# Altium PCB PCB1.PcbDoc (part 3 of 4)
Units mil, origin at the board's own origin, x right, y up, seen from the top; angles counter-clockwise.
Board outline 1968.5 x 2362.2 mil, 4 copper layers (Top Layer, GND, VCC, Bottom Layer), stack 30.634 mil thick; 134 components, 248 nets, 1063 pads, 710 vias.
Unrouted connection lines stored in the file: 163.
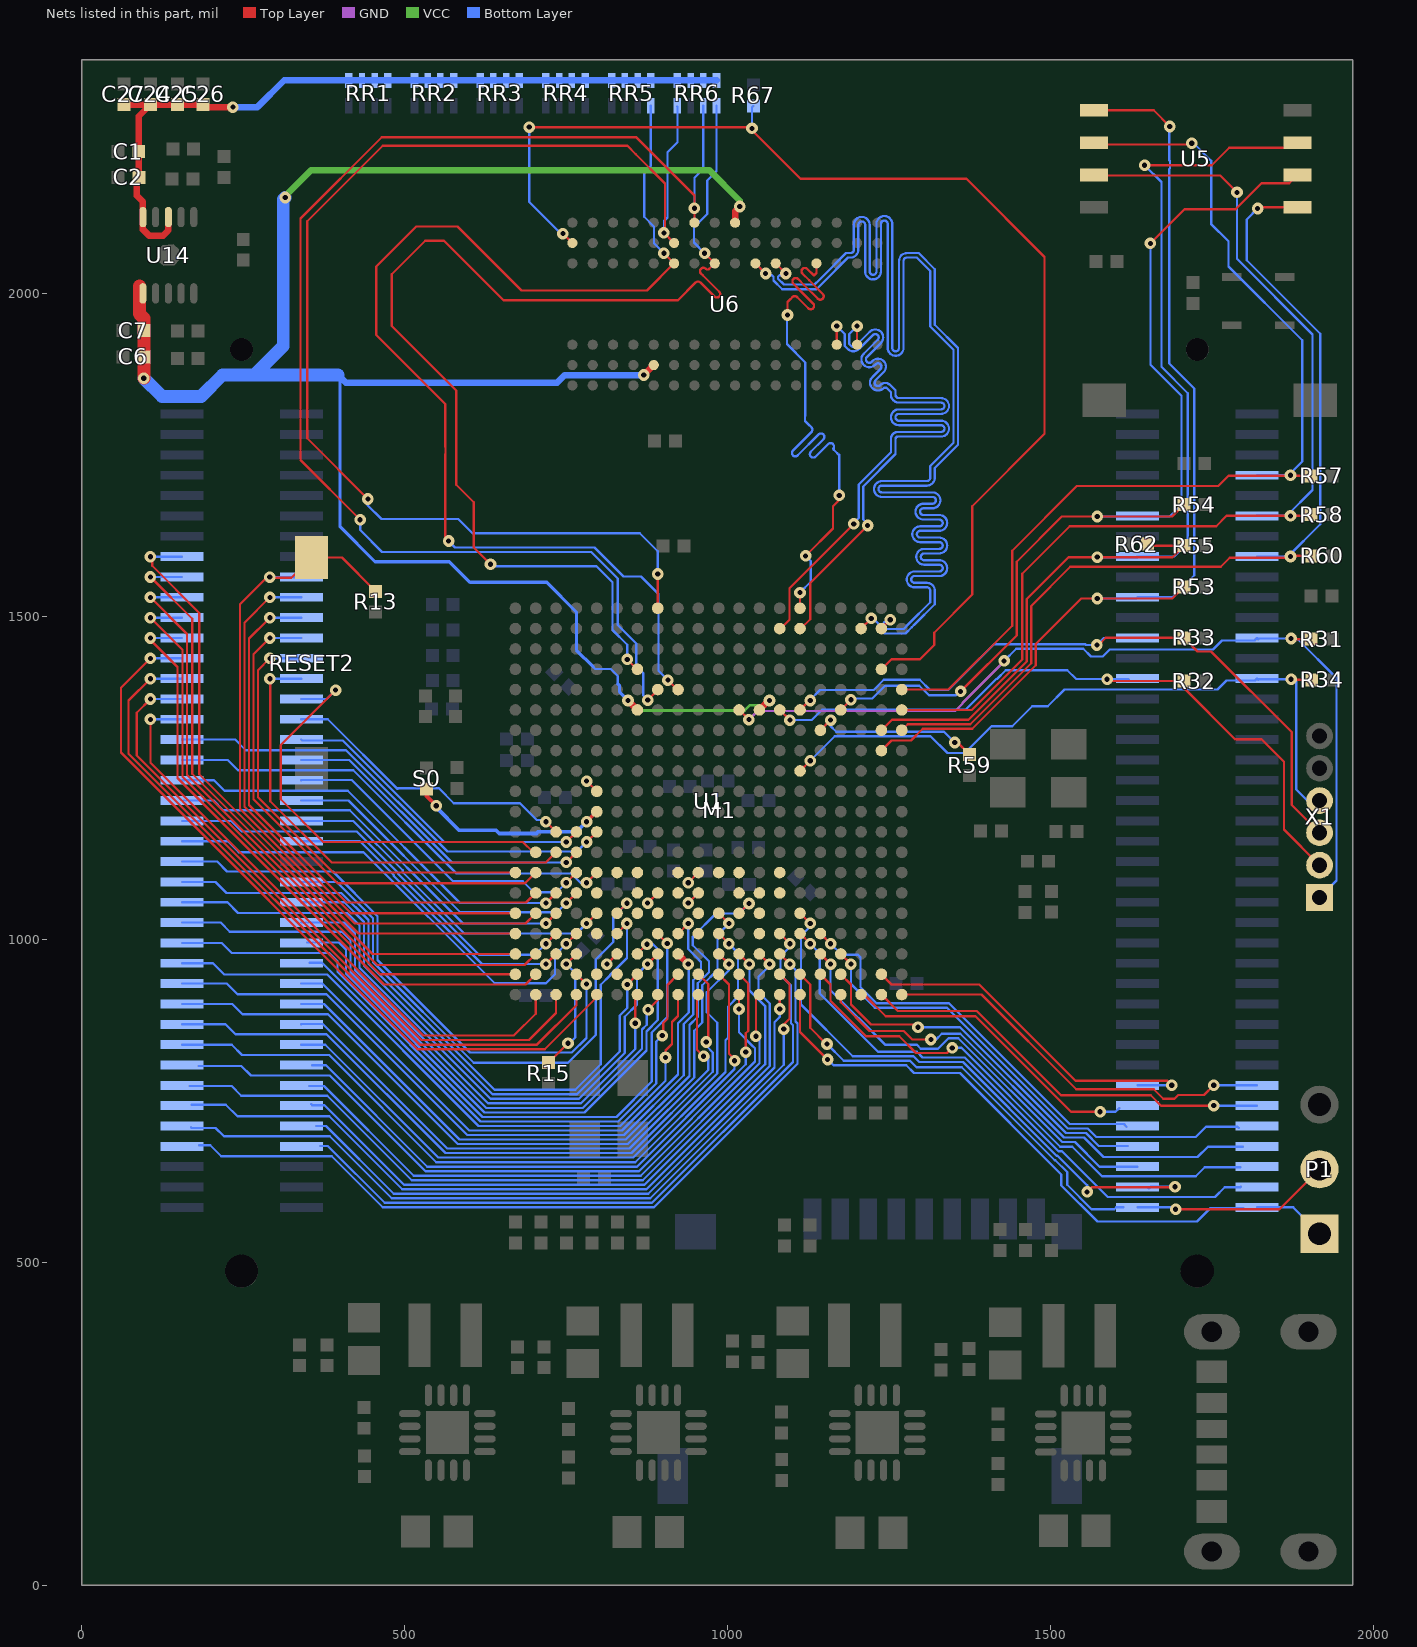
[diagram p5: the nets of this part, all layers, seen from the top]

## Via types
v1: diameter 18, hole 8, Top Layer to Bottom Layer, tented both sides, 708 vias
v2: diameter 40, hole 20, Top Layer to Bottom Layer, tented both sides, 2 vias

## Nets (pads, with @x,y where several pads share a name; then routed paths per layer and width w, separated by ;. In a path a pad name is that pad's centre, name@x,y a point inside that pad or via, vN(x,y) a via of type N, cw(c..) or ccw(c..) an arc to the next point about the centre after c; other vN are vias at no path point) (continued)
ADDR3-DM1: U1.F1 U6.D3 | length 986
  Top Layer w3.5: v1(1093,1967) 1093,1987.27 1096.71,1990.98 1100.42,1994.69 cw(c1104.14,1990.98) 1107.85,1994.69 1125.11,1977.43 ccw(c1128.83,1981.14) 1132.54,1977.43 ccw(c1128.83,1981.14) 1132.54,1984.85 1111.56,2005.83 1102.02,2015.37 cw(c1105.73,2019.08) 1102.02,2022.79 cw(c1105.73,2019.08) 1109.45,2022.79 1118.99,2013.25 1139.96,1992.28 ccw(c1143.67,1995.99) 1147.38,1992.28 ccw(c1143.67,1995.99) 1147.38,1999.71 1126.41,2020.68 1116.14,2030.95 cw(c1119.85,2034.66) 1116.14,2038.37 cw(c1119.85,2034.66) 1123.57,2038.37 1133.84,2028.1 ; U1.F1@1112.35,1512.85 v1(1112.35,1537) ; v1(1121,1594) 1163.5,1636.5 1163.5,1671 1173,1680.5 v1(1173,1687.59) ; 1133.87,2028.13 1137.73,2032 1137.73,2036.49 1137.73,2043.49 U6.D3@1137.73,2046.99
  Bottom Layer w3.5: v1(1093,1967) 1091.99,1965.99 1091.99,1922.01 1120.49,1893.51 1120.49,1810.51 ; v1(1112.35,1537) 1112.35,1537.35 1129,1554 1129,1586 v1(1121,1594) ; 1120,1810 1120,1803 1122.5,1800.5 1126.21,1796.79 1129.92,1793.08 cw(c1126.21,1789.36) 1129.92,1785.65 1101.37,1757.1 ccw(c1105.09,1753.39) 1101.37,1749.67 ccw(c1105.09,1753.39) 1108.8,1749.67 1141.06,1781.94 cw(c1144.77,1778.23) 1148.49,1781.94 cw(c1144.77,1778.23) 1148.49,1774.51 1129.1,1755.12 ccw(c1132.81,1751.41) 1129.1,1747.7 ccw(c1132.81,1751.41) 1136.52,1747.7 1155.91,1767.09 cw(c1159.62,1763.38) 1163.34,1767.09 cw(c1159.62,1763.38) 1163.34,1759.66 1164.73,1761.06 ccw(c1166.13,1759.66) 1164.73,1758.27 1170,1753 1172,1751 1173,1751 v1(1173,1687.59)
ADDR3-DQS0_N: U1.B2 U6.G3 | length 2001.2
  Top Layer w3.5: U6.G3@1043.24,2046.99 v1(1058.99,2031.24) ; U1.B2@1238.35,1481.35 v1(1252,1495)
  Bottom Layer w3.5: v1(1058.99,2031.24) 1061.77,2028.47 1069.01,2028.47 1071.24,2026.24 1071.24,2020.44 1084.61,2007.07 1137.66,2007.07 1147.34,2016.75 1186.59,2056 1190.39,2056 ccw(c1190.39,2068.25) 1202.64,2068.25 1202.64,2106.75 cw(c1207.89,2106.75) 1213.14,2106.75 1213.14,2034.4 ccw(c1225.39,2034.4) 1237.64,2034.4 1237.64,2108 cw(c1242.89,2108) 1248.14,2108 1248.14,1916 ccw(c1260.39,1916) 1272.64,1916 1272.64,2050.75 cw(c1277.89,2050.75) 1277.89,2056 1293.1,2056 1314,2035.1 1314,1949.1 1350,1913.1 1350,1769 1314,1733 1314,1715 cw(c1308.75,1715) 1308.75,1709.75 1239.09,1709.75 ccw(c1239.09,1697.5) 1239.09,1685.25 1317.5,1685.25 cw(c1317.5,1680) 1322.75,1680 cw(c1317.5,1680) 1317.5,1674.75 1303.46,1674.75 ccw(c1303.46,1662.5) 1303.46,1650.25 1327.98,1650.25 cw(c1327.98,1645) 1333.23,1645 cw(c1327.98,1645) 1327.98,1639.75 1298.52,1639.75 ccw(c1298.52,1627.5) 1298.52,1615.25 1327.98,1615.25 cw(c1327.98,1610) 1333.23,1610 cw(c1327.98,1610) 1327.98,1604.75 1304.64,1604.75 ccw(c1304.64,1592.5) 1304.64,1580.25 1327.98,1580.25 cw(c1327.98,1575) 1333.23,1575 cw(c1327.98,1575) 1327.98,1569.75 1289.85,1569.75 ccw(c1289.85,1557.5) 1289.85,1545.25 1308.75,1545.25 cw(c1308.75,1540) 1314,1540 1314,1522 1280.46,1488.46 1272.82,1480.82 1258.99,1480.82 1258.91,1480.75 1246.1,1480.75 1240.8,1486.05 1240.8,1488.95 1242.85,1491 1244.07,1491 1248.08,1495 v1(1252,1495)
ADDR3-DQS0_P: U1.C2 U6.F3 | length 2030.8
  Top Layer w3.5: U6.F3@1074.74,2046.99 v1(1090.49,2031.24) ; U1.C2@1209.35,1481.35 U1.C2@1206.85,1481.35 v1(1222.6,1497.1)
  Bottom Layer w3.5: v1(1090.49,2031.24) 1087.72,2028.47 1080.47,2028.47 1078.24,2026.24 1078.24,2023.34 1087.51,2014.07 1134.76,2014.07 1142.39,2021.7 1147.77,2027.08 1183.69,2063 1190.39,2063 ccw(c1190.39,2068.25) 1195.64,2068.25 1195.64,2106.75 cw(c1207.89,2106.75) 1220.14,2106.75 1220.14,2034.4 ccw(c1225.39,2034.4) 1230.64,2034.4 1230.64,2108 cw(c1242.89,2108) 1255.14,2108 1255.14,1916 ccw(c1260.39,1916) 1265.64,1916 1265.64,2050.75 cw(c1277.89,2050.75) 1277.89,2063 1296,2063 1321,2038 1321,1952 1357,1916 1357,1766.1 1321,1730.1 1321,1715 cw(c1308.75,1715) 1308.75,1702.75 1239.09,1702.75 ccw(c1239.09,1697.5) 1239.09,1692.25 1317.5,1692.25 cw(c1317.5,1680) 1329.75,1680 cw(c1317.5,1680) 1317.5,1667.75 1303.46,1667.75 ccw(c1303.46,1662.5) 1303.46,1657.25 1327.98,1657.25 cw(c1327.98,1645) 1340.23,1645 cw(c1327.98,1645) 1327.98,1632.75 1298.52,1632.75 ccw(c1298.52,1627.5) 1298.52,1622.25 1327.98,1622.25 cw(c1327.98,1610) 1340.23,1610 cw(c1327.98,1610) 1327.98,1597.75 1304.64,1597.75 ccw(c1304.64,1592.5) 1304.64,1587.25 1327.98,1587.25 cw(c1327.98,1575) 1340.23,1575 cw(c1327.98,1575) 1327.98,1562.75 1289.85,1562.75 ccw(c1289.85,1557.5) 1289.85,1552.25 1308.75,1552.25 cw(c1308.75,1540) 1321,1540 1321,1519.1 1290.36,1488.46 1285.41,1483.51 1275.72,1473.82 1261.89,1473.82 1261.81,1473.75 1243.2,1473.75 1233.8,1483.15 1233.8,1488.95 1225.65,1497.1 v1(1222.6,1497.1)
ADDR3-DQS1_N: U1.F2 U6.B7 | length 1031.1
  Top Layer w3.5: U1.F2@1112.35,1481.35 U1.F2@1113.35,1481.35 ; U1.F2@1113,1481 U1.F2@1113.35,1481.35 ; U6.B7@1200.72,1921.01 v1(1200.72,1949.77) ; v1(1217,1641) 1128,1552 1128,1496 U1.F2@1113.35,1481.35
  Bottom Layer w3.5: 1198.57,1919.3 cw(c1194.88,1923.03) 1191.16,1919.31 1188.48,1922 1188.48,1937.52 v1(1200.72,1949.77) ; 1198.59,1919.31 1220.23,1940.95 cw(c1228.89,1932.29) 1237.55,1940.95 cw(c1228.89,1932.29) 1241.14,1932.29 cw(c1228.89,1932.29) 1237.55,1923.63 1215.91,1901.99 ccw(c1219.62,1898.28) 1215.91,1894.56 ccw(c1219.62,1898.28) 1223.32,1894.55 ; v1(1217,1641) 1217,1643.48 1210.18,1650.3 1210.18,1701.59 1260.19,1751.6 1260.19,1775 cw(c1264.03,1775) 1264.03,1778.84 1330.75,1778.84 ccw(c1330.75,1791.09) 1343,1791.09 ccw(c1330.75,1791.09) 1330.75,1803.34 1265.44,1803.34 cw(c1265.44,1808.59) 1265.44,1813.84 1330.75,1813.84 ccw(c1330.75,1826.09) 1343,1826.09 ccw(c1330.75,1826.09) 1330.75,1838.34 1265.44,1838.34 cw(c1265.44,1843.59) 1260.19,1843.59 1260.19,1850.29 1251.97,1858.51 ccw(c1244.37,1850.92) 1236.78,1858.51 cw(c1233.07,1862.23) 1229.36,1858.51 cw(c1233.07,1862.23) 1229.36,1865.94 1241.77,1878.35 ccw(c1233.11,1887.01) 1245.36,1887.01 ccw(c1233.11,1887.01) 1224.45,1895.67 1223.34,1894.56
ADDR3-DQS1_P: U1.G2 U6.C7 | length 1035.4
  Top Layer w3.5: U1.G2@1080.85,1481.35 1082.35,1481.35 1096,1495 1096,1544 v1(1195.5,1643.5) ; U6.C7@1169.23,1921.01 v1(1169.23,1949.77)
  Bottom Layer w3.5: v1(1169.23,1949.77) 1181.48,1937.52 1181.48,1919.1 1186.21,1914.36 ccw(c1194.88,1923.03) 1203.54,1914.36 1225.18,1936.01 cw(c1228.89,1932.29) 1232.6,1936.01 cw(c1228.89,1932.29) 1234.14,1932.29 cw(c1228.89,1932.29) 1232.6,1928.58 1210.96,1906.94 ccw(c1219.62,1898.28) 1210.96,1889.61 ccw(c1219.62,1898.28) 1228.29,1889.61 1229.4,1890.72 cw(c1233.11,1887.01) 1236.81,1890.74 ; v1(1195.5,1643.5) 1195.5,1645.12 1203.18,1652.8 1203.18,1704.48 1253.19,1754.49 1253.19,1775 cw(c1264.03,1775) 1264.03,1785.84 1330.75,1785.84 ccw(c1330.75,1791.09) 1336,1791.09 ccw(c1330.75,1791.09) 1330.75,1796.34 1265.44,1796.34 cw(c1265.44,1808.59) 1265.44,1820.84 1330.75,1820.84 ccw(c1330.75,1826.09) 1336,1826.09 ccw(c1330.75,1826.09) 1330.75,1831.34 1265.44,1831.34 cw(c1265.44,1843.59) 1253.19,1843.59 1253.19,1847.39 1247.02,1853.56 ccw(c1244.37,1850.92) 1241.73,1853.56 cw(c1233.07,1862.23) 1224.41,1853.56 cw(c1233.07,1862.23) 1224.41,1870.89 1236.82,1883.3 ccw(c1233.11,1887.01) 1238.36,1887.01 ccw(c1233.11,1887.01) 1236.82,1890.72
ADDR3-ODT0: RR6.6 U1.N5 U6.K1 | length 2087.3
  Top Layer w3.5: v1(431,1650) 338.5,1742.5 338.5,2116.5 464.5,2242.5 858.5,2242.5 859,2242 948.76,2152.24 v1(948.76,2132.26) U6.K1@948.76,2109.98 ; v1(876.4,1370.6) U1.N5@892.15,1386.35
  Bottom Layer w3.5: v1(431,1650) 431,1634 465,1600 789,1600 830,1559 830,1487 858.85,1458.15 858.85,1423.15 869.4,1412.6 869.4,1377.6 v1(876.4,1370.6) ; v1(948.76,2132.26) 948.76,2179.76 962.53,2193.53 RR6.6@962.53,2291
ADDR3-RAS: RR6.5 U1.P4 U6.J3 | length 1813.3
  Top Layer w3.5: v1(633,1581) 607,1607 607,1677 580,1704 580,1850 480,1950 480,2030.21 531.79,2082 561,2082 653,1990 923.26,1990 950.55,2017.29 cw(c954.27,2013.58) 957.98,2017.29 979.68,1995.6 ccw(c983.39,1999.31) 987.1,1995.59 ccw(c983.39,1999.31) 987.1,2003.02 961.69,2028.43 958.9,2031.22 cw(c962.61,2034.93) 958.9,2038.64 cw(c962.61,2034.93) 966.33,2038.64 ccw(c969.11,2041.43) 971.9,2038.64 976.54,2043.28 U6.J3@980.25,2046.99 v1(964.5,2062.74) ; v1(844.6,1433.6) U1.P4@860.35,1417.85
  Bottom Layer w3.5: v1(633,1581) 630,1578 797,1578 822,1553 822,1479 844.6,1456.4 v1(844.6,1433.6) ; v1(964.5,2062.74) 948,2079.24 948,2103 968.5,2123.5 968.5,2175.5 983,2190 RR6.5@983,2291
ADDR3-RESET: R67.1 U1.B4 U6.T2 | length 1895.5
  Top Layer w3.5: v1(693,2258) 1033,2258 1113,2178 1370,2178 1491,2057 1491,1783 1379,1671 1379,1534 1320,1475 1320,1456 1298,1434 1254,1434 U1.B4@1238.35,1418.35 ; v1(745,2093) 745,2093.27 U6.T2@759.78,2078.49
  Bottom Layer w3.5: v1(693,2258) 693,2142 742,2093 v1(745,2093) ; v1(1038,2256) 1038,2288.86 R67.1@1040,2290.86
ADDR3-S0: RR6.8 U1.N1 U6.L2 | length 1976.4
  Top Layer w3.5: v1(443,1682) 349,1776 349,2112.15 465.85,2229 485.9,2229 845,2229 858.08,2215.92 903.25,2170.75 903.25,2095.98 v1(901.51,2094.24) U6.L2@917.26,2078.49 ; U1.N1@891.95,1512.85 v1(891.95,1565.95)
  Bottom Layer w3.5: v1(443,1682) 443,1672 464,1651 583,1651 605,1629 863.95,1629 891.95,1601 v1(891.95,1565.95) ; v1(901.51,2094.24) 901.51,2112.51 907,2118 907,2219 922.37,2234.37 922.37,2289.63 RR6.8@922,2290
ADDR3-WE: RR5.5 U1.M5 U6.L3 | length 1805.1
  Top Layer w3.5: v1(568,1617) 563,1622 563,1751.26 563.25,1751.51 563.25,1762.49 563,1762.74 563,1829 456,1936 456,2042.21 517.79,2104 582,2104 681,2005 875.27,2005 U6.L3@917.26,2046.99 v1(901.51,2062.74) ; v1(907.6,1401.6) U1.M5@923.35,1385.85
  Bottom Layer w3.5: v1(568,1617) 578,1607 794,1607 839,1562 866,1562 893,1535 893,1416.2 v1(907.6,1401.6) ; RR5.5@881.2,2291 881.2,2198.2 871,2188 871,2119 886.25,2103.75 886.25,2078 v1(901.51,2062.74)
AJTAG_TCK: M1.J2_28 R34.2 U1.F9 X1.4 | length 1080.1
  Top Layer w3.5: U1.F9@1112.35,1260.85 v1(1128.05,1276.55) ; v1@1881,1402 R34.2@1904.86,1402
  Bottom Layer w3.5: v1(1128.05,1276.55) 1166.25,1314.75 1314.5,1314.75 1340.62,1288.63 1367.37,1288.63 1408.74,1330 1441,1330 1472,1361 1496,1361 1522,1387 1759,1387 1773,1401 1817.08,1401 M1.J2_28@1820.02,1403.94 M1.J2_28@1821.97,1402 ; M1.J2_28@1821,1402.97 v1(1872.86,1402.97) ; v1@1881,1402 1881,1232 1898,1215 X1.4@1917,1215
AJTAG_TDI: M1.J2_27 R32.2 U1.G6 X1.2 | length 1102.1
  Top Layer w3.5: U1.G6@1080.85,1355.35 v1(1096.6,1339.6) ; v1(1588,1403) 1591,1400 R32.2@1706.86,1400 1706.86,1389.14 1786,1310 1827,1310 1862,1275 1862,1170 X1.2@1917,1115
  Bottom Layer w3.5: v1(1096.6,1339.6) 1130.6,1339.6 1146.5,1355.5 1368.5,1355.5 1416.25,1403.25 1417.25,1403.25 1431,1417 1526.25,1417 1540,1403.25 1587.75,1403.25 v1(1588,1403) 1621,1403 M1.J2_27@1622,1402
AJTAG_TDO: M1.J2_23 R33.2 U1.F6 X1.3 | length 1124.1
  Top Layer w3.5: U1.F6@1112.35,1355.35 1127,1370 v1(1128.1,1370) ; v1(1572,1456) 1575,1456 1586,1467 R33.2@1706.86,1467 1727.86,1446 1749,1446 1874,1321 1874,1208 X1.3@1917,1165
  Bottom Layer w3.5: v1(1128.1,1370) 1128.1,1371.09 1143.35,1386.35 1226.35,1386.35 1242,1402 1297.9,1402 1313.55,1386.35 1342,1386.35 1412.65,1457 1553.9,1457 1554.9,1456 v1(1572,1456) 1582.93,1466.93 M1.J2_23@1634.98,1466.93
AJTAG_TMS: M1.J2_24 R31.2 U1.J6 X1.1 | length 1401.9
  Top Layer w3.5: U1.J6@1017.35,1356.15 v1(1033.1,1340.4) ; v1@1427.25,1431.25 v1(1428.4,1431.25) ; v1@1866,1465 1870,1465 R31.2@1903.86,1465
  GND w3.5: v1(1033.1,1340.4) 1046.55,1353.85 1352.85,1353.85 1364,1365 1364,1366 1428.4,1430.4 v1(1428.4,1431.25)
  Bottom Layer w3.5: v1(1428.4,1431.25) 1447.15,1450 1551,1450 1563,1438 1581,1438 1592,1449 1752,1449 1766,1463 1816.09,1463 M1.J2_24@1820.02,1466.93 M1.J2_24@1821.96,1465 ; M1.J2_24@1820.99,1465.97 v1(1872.86,1465.97) ; 1883,1465 1943,1405 1943,1091 X1.1@1917,1065
APS-CLK: R59.2 U1.E7 | length 265.2
  Top Layer w3.5: U1.E7@1143.85,1323.85 v1(1159.6,1339.6) ; v1(1352,1305) 1356.14,1305 R59.2@1375,1286.14
  Bottom Layer w3.5: v1(1159.6,1339.6) 1159.6,1330.4 1168.25,1321.75 1335.25,1321.75 v1(1352,1305)
ASPI-CS: M1.J2_16 R60.2 U1.A7 U5.1 | length 1528.8
  Top Layer w3.5: U1.A7@1270.7,1323 U1.A7@1269.85,1323.85 1279.25,1333.25 1376.05,1333.25 1470.45,1427.65 1470.45,1516.45 1531,1577 1764,1577 1778,1591 1863.08,1591 1866.08,1594 R60.2@1904.86,1594 ; v1(1821,2132) 1823,2134 U5.1@1882.85,2134
  Bottom Layer w3.5: M1.J2_16@1820.02,1592.91 v1(1871.89,1592.91) ; v1(1821,2132) 1804,2115 1804,2052 1918,1938 1918,1643 v1@1867.91,1592.91
ASPI-DQ0/MODE0: M1.J2_19 R53.2 U1.B8 U5.5 | length 1598.2
  Top Layer w3.5: U1.B8@1238.35,1292.35 1254.1,1308.1 1284.1,1308.1 1302.25,1326.25 1378.95,1326.25 1477.45,1424.75 1477.45,1457.45 1548,1528 v1(1572.58,1528) 1688.86,1528 R53.2@1706.86,1546 ; U5.5@1567.85,2284 1660,2284 v1(1685,2259)
  Bottom Layer w3.5: v1(1572.58,1528) 1633.06,1528 M1.J2_19@1634.98,1529.92 1688.92,1529.92 1723,1564 1723,1853 1684,1892 1684,2193.26 1685.25,2194.51 1685.25,2205.49 1684,2206.74 1684,2258 v1(1685,2259)
ASPI-DQ1/MODE1: M1.J2_11 R54.2 U1.D6 U5.2 | length 1577.6
  Top Layer w3.5: U1.D6@1175.35,1355.35 v1(1191.1,1371.1) ; v1(1361,1384) 1447.8,1470.8 1447.8,1585 1517.8,1655 v1(1572.58,1655) 1688.53,1655 R54.2@1706.86,1673.33 ; v1(1655,2078) 1708,2131 1787,2131 1827,2171 1869.85,2171 U5.2@1882.85,2184
  Bottom Layer w3.5: v1@1191.1,1373.1 1224.1,1373.1 1244,1393 1297,1393 1312,1378 1354,1378 1361,1385 v1(1361,1384) ; v1(1572.58,1655) 1685,1655 1703,1673 1703,1842 1655,1890 v1(1655,2078)
ASPI-DQ2/MODE2: M1.J2_15 R55.2 R62.1 U1.B7 U5.3 | length 1714.7
  Top Layer w3.5: U1.B7@1238.35,1323.85 1254.75,1340.25 1373.15,1340.25 1463.45,1430.55 1463.45,1527 1528.2,1591.75 1572.33,1591.75 v1(1572.58,1592) 1689.19,1592 R55.2@1706.86,1609.67 1652.48,1609.67 R62.1@1650.14,1612 ; v1(1646,2199) 1750,2199 1777,2226 1874.85,2226 U5.3@1882.85,2234
  Bottom Layer w3.5: v1(1572.58,1592) 1634.07,1592 M1.J2_15@1634.98,1592.91 1691.91,1592.91 1713,1614 1713,1846 1672,1887 1672,2173 v1(1646,2199)
ASPI-DQ3/MODE3: M1.J2_12 R58.2 U1.A6 U5.7 | length 1687.5
  Top Layer w3.5: U1.A6@1269.85,1355.35 1378.35,1355.35 1456.45,1433.45 1456.45,1566.45 1530,1640 1757,1640 1773,1656 1866,1656 1901.86,1656 R58.2@1903.86,1658 ; U5.7@1567.85,2184 1568.85,2183 1763,2183 v1(1789,2157)
  Bottom Layer w3.5: v1(1789,2157) 1789,2054 1906,1937 1906,1696 v1@1866,1656 ; M1.J2_12@1820.02,1655.9 v1(1871.89,1655.9)
ASPI-SCK/MODE4: M1.J2_8 R57.2 U1.A5 U5.6 | length 1641
  Top Layer w3.5: U1.A5@1269.85,1386.85 1341.75,1386.85 1440.8,1485.9 1440.8,1602 1540.8,1702 1760,1702 1776,1718 1868,1718 R57.2@1903.86,1718 ; U5.6@1567.85,2234 1570.85,2231 1717,2231 v1(1719,2233)
  Bottom Layer w3.5: v1(1719,2233) 1722,2233 1749,2206 1749,2108 1775.75,2081.25 1775.75,2042.25 1890,1928 1890,1740 v1@1868,1718 ; M1.J2_8@1820.02,1718.9 v1(1871.89,1718.9)
B34_0: U1.R19
B34_25: U1.T19
B34_L1_N: U1.T10 | length 22.2
  Top Layer w3.5: v1(781.75,1245.15) U1.T10@797.45,1229.45
B34_L1_P: S0.2 U1.T11 | length 315.5
  Top Layer w6: S0.2@534,1232.86 534,1222 v1(549,1207) ; v1(781.75,1182.15) U1.T11@797.45,1197.85
  Bottom Layer w6: v1@550,1208 v1(549,1207) 549,1204 584,1169 641.5,1169 646.5,1164 704,1164 706.65,1166.65 766.25,1166.65 v1(781.75,1182.15)
B34_L2_N: M1.J1_47 U1.U12 | length 498.2
  Top Layer w3.5: v1(750.25,1150.75) U1.U12@765.95,1166.45
  Bottom Layer w3.5: M1.J1_47@340,1309.45 341.45,1308 404.1,1308 561.35,1150.75 v1(750.25,1150.75)
B34_L2_P: M1.J1_48 U1.T12 | length 726.9
  Top Layer w3.5: v1(781.75,1150.75) U1.T12@797.45,1166.45
  Bottom Layer w3.5: M1.J1_48@154.96,1309.45 237.55,1309.45 254,1293 409.2,1293 566.2,1136 767,1136 v1(781.75,1150.75)
B34_L3_N: M1.J1_53 U1.V13 | length 722
  Top Layer w3.5: v1@292,1399 292,1214 387,1119 718.5,1119 U1.V13@734.45,1134.95
  Bottom Layer w3.5: v1(291.21,1403.73) M1.J1_53@339.79,1403.73
B34_L3_P: M1.J1_45 U1.U13 | length 498.4
  Top Layer w3.5: v1(750.2,1119.2) U1.U13@765.95,1134.95
  Bottom Layer w3.5: M1.J1_45@340,1277.95 414.35,1277.95 573.3,1119 615,1119 615.2,1119.2 v1(750.2,1119.2)
B34_L4_N: M1.J1_51 U1.W13 | length 691.8
  Top Layer w3.5: v1(393,1386) 308,1301 308,1217 374,1151 683,1151 699.05,1134.95 U1.W13@702.95,1134.95
  Bottom Layer w3.5: M1.J1_51@340,1372.44 379.44,1372.44 v1(393,1386)
B34_L4_P: M1.J1_49 U1.V12 | length 467.6
  Top Layer w3.5: v1(718.75,1182.25) U1.V12@734.45,1166.55
  Bottom Layer w3.5: M1.J1_49@340,1340.94 340.06,1341 381,1341 489,1233 490,1234 553,1234 576,1211 678.55,1211 704.52,1185.03 715.97,1185.03 v1(718.75,1182.25)
B34_L5_N: U1.T15 | length 0.5
  Top Layer w3.5: U1.T15@796.9,1071.95 U1.T15@797.45,1071.95
B34_L5_P: M1.J1_46 U1.T14 | length 727.8
  Top Layer w3.5: v1(781.7,1087.7) U1.T14@797.45,1103.45
  Bottom Layer w3.5: M1.J1_46@154.96,1277.95 226.05,1277.95 242,1262 420.4,1262 580.4,1102 758,1102 772.3,1087.7 v1(781.7,1087.7)
B34_L6_N: U1.R14
B34_L6_P: U1.P14
B34_L7_N: M1.J1_66 U1.Y17 | length 1008.7
  Top Layer w3.5: v1(106.17,1592.7) 108.95,1589.92 108.95,1578.59 182,1505.53 182,1255.6 428.65,1008.95 U1.Y17@671.45,1008.95
  Bottom Layer w3.5: v1(106.17,1592.7) M1.J1_66@154.75,1592.7
B34_L7_P: M1.J1_61 U1.Y16 | length 876.9
  Top Layer w3.5: v1(291.21,1529.71) 252,1490.5 252,1205.4 416.95,1040.45 U1.Y16@671.45,1040.45
  Bottom Layer w3.5: v1(291.21,1529.71) M1.J1_61@339.79,1529.71
B34_L8_N: M1.J1_55 U1.Y14 | length 718.1
  Top Layer w3.5: v1(291.21,1435.22) 273,1417.01 273,1220 389.55,1103.45 U1.Y14@671.45,1103.45
  Bottom Layer w3.5: v1(291.21,1435.22) M1.J1_55@339.79,1435.22
B34_L8_P: M1.J1_57 U1.W14 | length 806.3
  Top Layer w3.5: v1(291.21,1466.72) 266,1441.51 266,1217.1 396.1,1087 686.5,1087 U1.W14@702.95,1103.45
  Bottom Layer w3.5: v1(291.21,1466.72) M1.J1_57@339.79,1466.72
B34_L9_N: M1.J1_38 U1.U17 | length 751.6
  Top Layer w3.5: v1(750.2,993.2) U1.U17@765.95,1008.95
  Bottom Layer w3.5: M1.J1_38@154.96,1151.97 226.03,1151.97 243,1135 436.37,1135 639.37,932 719,932 732.95,945.95 732.95,975.95 v1(750.2,993.2)
B34_L9_P: M1.J1_39 U1.T16 | length 544.5
  Top Layer w3.5: v1(781.7,1024.7) U1.T16@797.45,1040.45
  Bottom Layer w3.5: M1.J1_39@340,1183.46 420.54,1183.46 497,1107 497,1104.07 592.07,1009 766,1009 v1(781.7,1024.7)
B34_L10_N: M1.J1_59 U1.W15 | length 866.5
  Top Layer w3.5: v1@294,1496 289,1496 259,1466 259,1208.3 410.3,1057 688,1057 U1.W15@702.95,1071.95
  Bottom Layer w3.5: v1(291.21,1498.21) M1.J1_59@339.79,1498.21
B34_L10_P: M1.J1_44 U1.V15 | length 664.8
  Top Layer w3.5: v1(718.7,1056.2) U1.V15@734.45,1071.95
  Bottom Layer w3.5: M1.J1_44@154.96,1246.46 204.54,1246.46 221,1230 412,1230 585.8,1056.2 v1(718.7,1056.2)
B34_L11_N: M1.J1_41 U1.U15 | length 510.1
  Top Layer w3.5: v1(750.2,1056.2) U1.U15@765.95,1071.95
  Bottom Layer w3.5: M1.J1_41@340,1214.96 M1.J1_41@340,1214.96 413,1215 586.05,1041.95 735.95,1041.95 v1(750.2,1056.2)
B34_L11_P: M1.J1_43 U1.U14 | length 510.9
  Top Layer w3.5: v1(750.2,1087.7) U1.U14@765.95,1103.45
  Bottom Layer w3.5: M1.J1_43@340,1246.46 340.54,1247 418,1247 575,1090 683,1090 700,1073 735.5,1073 v1(750.2,1087.7)
B34_L12_N: M1.J1_36 U1.U19 | length 903.7
  Top Layer w3.5: U1.U19@765.8,946.4 v1(781.5,930.69)
  Bottom Layer w3.5: M1.J1_36@154.96,1120.47 209.53,1120.47 225,1105 388.9,1105 458,1035.9 458,968.1 601.35,824.75 758.9,824.75 781.5,847.35 v1(781.5,930.69)
B34_L12_P: R15.2 U1.U18 | length 198.8
  Top Layer w3.5: R15.2@723,809.14 723.14,809.14 v1(753,839) ; v1(750.2,961.7) U1.U18@765.95,977.45
  Bottom Layer w3.5: v1(750.2,961.7) 764,947.9 764,848 755,839 v1(753,839)
B34_L13_N: M1.J1_31 U1.P19 | length 814.6
  Top Layer w3.5: v1(844.7,930.2) U1.P19@860.45,945.95
  Bottom Layer w3.5: M1.J1_31@340,1057.48 406.52,1057.48 437,1027 437,959.2 636.2,760 766.95,760 833.25,826.3 833.25,882.25 844.7,893.7 v1(844.7,930.2)
B34_L13_P: M1.J1_32 U1.N18 | length 1054.7
  Top Layer w3.5: v1(876.2,961.7) U1.N18@891.95,977.45
  Bottom Layer w3.5: M1.J1_32@154.96,1057.48 225.52,1057.48 242,1041 411,1041 430,1022 430,956.02 633.02,753 769.85,753 841,824.15 841,880 860,899 860,945.5 v1(876.2,961.7)
B34_L14_N: M1.J1_29 U1.P20 | length 786.7
  Top Layer w3.5: v1(857,870) 857,911 U1.P20@860.45,914.45
  Bottom Layer w3.5: M1.J1_29@340,1025.98 406.02,1025.98 423,1009 423,952.38 629.38,746 772.75,746 857,830.25 v1(857,870)
B34_L14_P: M1.J1_30 U1.N20 | length 992.2
  Top Layer w3.5: v1(877,891) 891.95,905.95 U1.N20@891.95,914.45
  Bottom Layer w3.5: M1.J1_30@154.96,1025.98 215.02,1025.98 229,1012 403,1012 416,999 416,949.48 626.48,739 775.65,739 867.45,830.8 867.45,860.3 875,867.85 875,889 v1(877,891)
B34_L15_N: M1.J1_54 U1.U20 | length 1100.7
  Top Layer w3.5: v1(106.17,1403.73) 72.45,1370.01 72.45,1287.45 522.9,837 705,837 765.95,897.95 U1.U20@765.95,914.45
  Bottom Layer w3.5: v1(106.17,1403.73) M1.J1_54@154.75,1403.73
B34_L15_P: M1.J1_56 U1.T20 | length 1177.8
  Top Layer w3.5: v1(106.17,1435.22) 60.5,1389.55 60.5,1289.5 520,830 717,830 797.45,910.45 U1.T20@797.45,914.45
  Bottom Layer w3.5: v1(106.17,1435.22) M1.J1_56@154.75,1435.22
B34_L16_N: M1.J1_50 U1.W20 | length 931.1
  Top Layer w3.5: v1(106.17,1340.73) 106.17,1273.53 528.7,851 668.95,851 702.95,885 U1.W20@702.95,914.45
  Bottom Layer w3.5: v1(106.17,1340.73) M1.J1_50@154.75,1340.73
B34_L16_P: M1.J1_52 U1.V20 | length 1022.7
  Top Layer w3.5: v1(106.17,1372.23) 84.9,1350.96 84.9,1284.9 525.8,844 692.45,844 734.45,886 U1.V20@734.45,914.45
  Bottom Layer w3.5: v1(106.17,1372.23) M1.J1_52@154.75,1372.23
B34_L17_N: M1.J1_60 U1.Y19 | length 957.7
  Top Layer w3.5: v1(106.17,1498.21) 156,1448.38 156,1251.9 461.95,945.95 U1.Y19@671.45,945.95
  Bottom Layer w3.5: v1(106.17,1498.21) M1.J1_60@154.75,1498.21
B34_L17_P: M1.J1_64 U1.Y18 | length 996.1
  Top Layer w3.5: v1(106.17,1561.21) 171,1496.38 171,1256.7 450.25,977.45 U1.Y18@671.45,977.45
  Bottom Layer w3.5: v1(106.17,1561.21) M1.J1_64@154.75,1561.21
B34_L18_N: M1.J1_63 R13.1 RESET2.2 U1.W16 | length 1160.4
  Top Layer w3.5: v1@286,1560 245,1519 245,1202.5 422.8,1024.7 687.2,1024.7 U1.W16@702.95,1040.45 ; v1@291,1560 324.61,1560 RESET2.2@356,1591.39 402.76,1591.39 R13.1@455,1539.14
  Bottom Layer w3.5: v1(291,1561) 339.58,1561 M1.J1_63@340,1561.42
B34_L18_P: M1.J1_42 U1.V16 | length 664.8
  Top Layer w3.5: v1(718.7,1024.7) U1.V16@734.45,1040.45
  Bottom Layer w3.5: M1.J1_42@154.96,1214.96 204.04,1214.96 219,1200 415,1200 590.3,1024.7 v1(718.7,1024.7)
B34_L19_N: M1.J1_34 U1.R17 | length 1095.1
  Top Layer w3.5: U1.R17@828.5,1008.8 v1(844.2,1024.5)
  Bottom Layer w3.5: M1.J1_34@154.96,1088.98 207.02,1088.98 224,1072 401.9,1072 444,1029.9 444,962.1 639.1,767 764.05,767 803.75,806.7 803.75,929.75 818,944 818,944.8 844.2,971 v1(844.2,1024.5)
B34_L19_P: M1.J1_33 U1.R16 | length 875.8
  Top Layer w3.5: U1.R16@828.5,1040.3 v1(844.2,1056)
  Bottom Layer w3.5: M1.J1_33@340,1088.98 394.82,1088.98 451,1032.8 451,965 607.15,808.85 752.9,808.85 796,851.95 796,969 823,996 823,1034.8 v1(844.2,1056)
B34_L20_N: U1.R18 | length 22.3
  Top Layer w3.5: v1(813.2,961.7) U1.R18@828.95,977.45
B34_L20_P: U1.T17
B34_L21_N: M1.J1_37 U1.V18 | length 480.6
  Top Layer w3.5: v1(718.7,961.7) U1.V18@734.45,977.45
  Bottom Layer w3.5: M1.J1_37@340,1151.97 430.71,1151.97 483,1099.69 483,1098.27 619.57,961.7 v1(718.7,961.7)
B34_L21_P: M1.J1_40 U1.V17 | length 680
  Top Layer w3.5: v1(718.7,993.2) U1.V17@734.45,1008.95
  Bottom Layer w3.5: M1.J1_40@154.96,1183.46 231.54,1183.46 248,1167 425.69,1167 490,1102.69 490,1101.17 615.17,976 701.5,976 v1(718.7,993.2)
B34_L22_N: M1.J1_58 U1.W19 | length 976.7
  Top Layer w3.5: v1(106.17,1466.72) 106.17,1463.83 148,1422 148,1250 468,930 687,930 U1.W19@702.95,945.95
  Bottom Layer w3.5: v1(106.17,1466.72) M1.J1_58@154.75,1466.72
B34_L22_P: M1.J1_62 U1.W18 | length 1016.2
  Top Layer w3.5: v1(106.17,1529.71) 163,1472.88 163,1254.8 457.6,960.2 685.7,960.2 U1.W18@702.95,977.45
  Bottom Layer w3.5: v1(106.17,1529.71) M1.J1_62@154.75,1529.71
B34_L23_N: M1.J1_27 U1.P18 | length 902.6
  Top Layer w3.5: U1.P18@859.55,976.85 v1(875.25,992.55)
  Bottom Layer w3.5: M1.J1_27@349,995 398.28,995 409,984.28 409,946.58 623.58,732 778.55,732 874.45,827.9 874.45,857.4 892,874.95 892,985 884.45,992.55 v1(875.25,992.55)
B34_L23_P: M1.J1_28 U1.N17 | length 1117.7
  Top Layer w3.5: U1.N17@890.85,1009.45 v1(906.55,993.75)
  Bottom Layer w3.5: M1.J1_28@154.96,994.49 216.51,994.49 232,979 383,979 396,966 396,949.68 620.68,725 828.01,725 882.75,779.74 882.75,855.8 906.55,879.6 v1(906.55,993.75)
B34_L24_N: U1.P16
B34_L24_P: U1.P15
B35_0: U1.G14
B35_25: U1.J15
B35_L1_N: M1.J2_70 U1.B20 | length 652.9
  Top Layer w3.5: U1.B20@1238.35,914.45 1263.8,889 1386,889 1516.5,758.5 1655.5,758.5 1671.51,742.49 v1(1753,742.49)
  Bottom Layer w3.5: v1(1753,742.49) M1.J2_70@1820.02,742.48
B35_L1_P: M1.J2_69 U1.C20 | length 477.8
  Top Layer w3.5: U1.C20@1206.85,914.45 1211.55,914.45 1245,881 1384.1,881 1532.1,733 v1(1577,733)
  Bottom Layer w3.5: v1(1577,733) 1601,733 M1.J2_69@1607,739
B35_L2_N: M1.J2_68 U1.A20 | length 625.7
  Top Layer w3.5: U1.A20@1269.85,914.45 1393.55,914.45 1540,768 1660,768 1675,753 1692.25,753 1698.25,759 1738.01,759 v1(1753,773.99)
  Bottom Layer w3.5: v1(1753,773.99) M1.J2_68@1820.03,773.98
B35_L2_P: M1.J2_67 U1.B19 | length 573.9
  Top Layer w3.5: U1.B19@1238.35,945.95 1254.1,930.2 1389.8,930.2 1539,781 1681,781 v1(1688,774)
  Bottom Layer w3.5: M1.J2_67@1634.98,773.98 1683.98,773.98 v1(1688,774)
B35_L3_N: M1.J2_72 U1.D18 | length 759.6
  Top Layer w3.5: U1.D18@1175.35,977.45 v1(1191.1,961.7)
  Bottom Layer w3.5: v1(1191.1,961.7) 1191.1,930.9 1228,894 1340.1,894 1527.1,707 1558,707 1571,694 1725,694 1741,710 1790,710 M1.J2_72@1792,708
B35_L3_P: M1.J2_71 U1.E17 | length 625
  Top Layer w3.5: U1.E17@1143.85,1008.95 v1(1159.6,993.2)
  Bottom Layer w3.5: v1(1159.6,993.2) 1176.8,976 1202,976 1206,972 1206,925.9 1230.9,901 1343,901 1530,714 1614,714 M1.J2_71@1618,710
B35_L4_N: M1.J2_74 U1.D20 | length 747.8
  Top Layer w3.5: U1.D20@1175.35,914.45 1175.35,902.65 1220,858 1273,858 1286,845 v1(1315,845)
  Bottom Layer w3.5: v1(1315,845) 1323,845 1332,854 1360.3,854 1521.3,693 1552.2,693 1582.2,663 1728,663 1744,679 M1.J2_74@1798,679
B35_L4_P: M1.J2_73 U1.D19 | length 573.1
  Top Layer w3.5: U1.D19@1175.35,945.95 1191.1,930.2 1191.1,899 1222.05,868.05 1290.95,868.05 v1(1295,864)
  Bottom Layer w3.5: v1(1295,864) 1360.2,864 1524.2,700 1555.1,700 1575.1,680 M1.J2_73@1620,680
B35_L5_N: M1.J2_76 U1.E19 | length 807
  Top Layer w3.5: U1.E19@1143.85,945.95 1159.6,930.2 1159.6,905 1214.6,850 1266,850 1292,824 1340,824 v1(1348,832)
  Bottom Layer w3.5: v1(1348,832) 1362.5,832 1515.5,679 1534,679 1580,633 1725,633 1739,647 M1.J2_76@1794,647
B35_L5_P: M1.J2_75 U1.E18 | length 664.8
  Top Layer w3.5: U1.E18@1143.85,977.45 v1(1159.6,961.7)
  Bottom Layer w3.5: v1(1159.6,961.7) 1159.6,921.2 1243.8,837 1293,837 1299.25,830.75 1326,830.75 1342.25,847 1357.4,847 1518.4,686 1538,686 1576,648 M1.J2_75@1634.98,647.99
B35_L6_N: M1.J2_78 U1.F17 | length 894.7
  Top Layer w3.5: U1.F17@1112.35,1008.95 v1(1128.1,993.2)
  Bottom Layer w3.5: v1(1128.1,993.2) 1143,978.3 1143,916 1233,826 1293,826 1302,817 1367.6,817 1512.6,672 1518,672 1589,601 1755,601 1770,616 1794,616 M1.J2_78@1795,617
B35_L6_P: M1.J2_77 U1.F16 | length 904.6
  Top Layer w3.5: U1.F16@1112.35,1040.45 v1(1128.1,1024.7) ; v1(1557,609) 1564,616 1692,616 v1(1693,617)
  Bottom Layer w3.5: v1(1128.1,1024.7) 1128.1,1020.1 1114,1006 1114,999.25 1113.85,999.1 1113.85,987.3 1114,987.15 1114,967.75 1113.85,967.6 1113.85,899.15 1194,819 1288,819 1297,810 1364.7,810 1509.7,665 1511,665 1557,619 v1(1557,609) ; M1.J2_77@1652,614 1655,617 v1(1693,617)
B35_L7_N: M1.J1_26 U1.M20 | length 1023.8
  Top Layer w3.5: v1(904,817) 904,828 914,838 914,872 923.45,881.45 U1.M20@923.45,914.45
  Bottom Layer w3.5: M1.J1_26@154.96,962.99 203.01,962.99 220.51,945.49 380,945.49 614.49,711 833.81,711 904,781.19 v1(904,817)
B35_L7_P: M1.J1_25 U1.M19 | length 846.7
  Top Layer w3.5: v1(899,851) 900.5,852.5 900.5,870.5 907,877 907,929.5 U1.M19@923.45,945.95 U1.M19@924.05,945.95
  Bottom Layer w3.5: M1.J1_25@353,964 371.39,964 617.39,718 830.91,718 889.75,776.84 889.75,841.75 v1(899,851)
B35_L8_N: M1.J1_23 U1.M18 | length 918.1
  Top Layer w3.5: U1.M18@923.45,974.55 U1.M18@923.45,977.45
  Top Layer w10: U1.M18@923.45,977.45 v1(939.2,961.7)
  Bottom Layer w3.5: M1.J1_23@340,931.49 372.51,931.49 600,704 836.71,704 923.35,790.64 923.35,870 940,886.65 940,959 v1@937,962
B35_L8_P: M1.J1_24 U1.M17 | length 1189.2
  Top Layer w3.5: U1.M17@923.55,1008.85 v1(939.25,1024.55)
  Bottom Layer w3.5: M1.J1_24@154.96,931.49 224.51,931.49 241,915 379.1,915 597.1,697 839.61,697 932.25,789.64 932.25,869 947,883.75 947,936.75 959,948.75 959,965 950.25,973.75 950.25,974 939.25,985 v1(939.25,1024.55)
B35_L9_N: M1.J1_19 U1.L20 | length 883.9
  Top Layer w3.5: U1.L20@954.85,914.45 952.75,912.35 952.75,829.25 v1(963,819)
  Bottom Layer w3.5: M1.J1_19@340,868.46 340.54,869 373,869 566,676 848.31,676 970,797.69 v1@970,819 ; v1@962,820 v1(963,819)
B35_L9_P: M1.J1_20 U1.L19 | length 1119.8
  Top Layer w3.5: U1.L19@954.85,945.95 970,930.8 970,844 v1(967,841)
  Bottom Layer w3.5: M1.J1_20@154.96,868.46 222.54,868.46 238,853 379.1,853 563.1,669 851.21,669 977.25,795.04 977.25,824.9 967,835.15 v1(967,841)
B35_L10_N: M1.J1_16 U1.J19 | length 1130.3
  Top Layer w3.5: U1.J19@1017.85,945.95 1032.1,931.7 1032.1,858.25 1028.35,854.5 v1(1028.35,825.35)
  Bottom Layer w3.5: M1.J1_16@181,804 247,804 262,789 384.1,789 532.1,641 862.8,641 1028.35,806.54 v1(1028.35,825.35)
B35_L10_P: M1.J1_15 U1.K19 | length 938.6
  Top Layer w3.5: U1.K19@986.45,945.95 1002.15,930.25 1002.15,822.85 1011,814 v1(1011,812)
  Bottom Layer w3.5: M1.J1_15@357,805 378,805 535,648 859.91,648 1011,799.09 v1(1011,812)
B35_L11_N: U1.L17
B35_L11_P: U1.L16
B35_L12_N: M1.J1_17 U1.K18 | length 983.3
  Top Layer w3.5: U1.K18@986.45,977.45 v1(1002.15,961.75)
  Bottom Layer w3.5: M1.J1_17@340,836.97 377.03,836.97 552,662 854.11,662 984.25,792.14 984.25,870.75 968,887 968,918 1002.15,952.15 v1(1002.15,961.75)
B35_L12_P: M1.J1_18 U1.K17 | length 1209.8
  Top Layer w3.5: U1.K17@986.45,1008.95 v1(1002.15,993.25)
  Bottom Layer w3.5: M1.J1_18@154.96,836.97 232.03,836.97 248,821 383.1,821 549.1,655 857.01,655 996.75,794.74 996.75,843.75 1001,848 1001,896 1016.4,911.4 1016.4,979 v1(1002.15,993.25)
B35_L13_N: U1.H17
B35_L13_P: U1.H16
B35_L14_N: M1.J1_12 U1.H18 | length 1222.9
  Top Layer w3.5: U1.H18@1049.35,977.45 v1(1065.1,961.7)
  Bottom Layer w3.5: M1.J1_12@170,744 223,744 241,726 383.1,726 496.1,613 874.4,613 1065.25,803.85 1065.25,900.75 1048,918 1048,942 1065.1,959.1 v1(1065.1,961.7)
B35_L14_P: M1.J1_11 U1.J18 | length 1019.8
  Top Layer w3.5: U1.J18@1017.85,977.45 v1(1033.55,961.75)
  Bottom Layer w3.5: M1.J1_11@355,745 357,743 376,743 499,620 871.5,620 1058.25,806.75 1058.25,896.75 1034,921 1034,961.3 v1(1033.55,961.75)
B35_L15_N: M1.J2_80 P1.1 U1.F20 | length 998.7
  Top Layer w3.5: U1.F20@1112.35,914.45 1112.35,856.65 v1(1155,814)
  Bottom Layer w3.5: v1(1155,814) 1164,805 1277,805 1289,793 1360,793 1517,636 1517,618.95 1572.95,563 1727,563 1748,584 M1.J2_80@1799,584 ; M1.J2_80@1820.02,585 1876,585 P1.1@1917,544
B35_L15_P: M1.J2_79 P1.2 U1.F19 | length 1012.6
  Top Layer w3.5: U1.F19@1112.35,945.95 1128.1,930.2 1128.1,863 1153.1,838 v1(1154,838) ; v1(1694,582) 1855,582 P1.2@1917,644
  Bottom Layer w3.5: v1(1154,838) 1180,812 1282.73,812 1292.73,802 1362.8,802 1506.8,658 1507.73,658 1526,639.73 1526,619.85 1563.85,582 1599,582 1602,585 M1.J2_79@1613,585 ; M1.J2_79@1634.98,585 1691,585 v1(1694,582)
B35_L16_N: M1.J1_8 U1.G18 | length 1239.6
  Top Layer w3.5: U1.G18@1080.85,977.45 v1(1096.6,961.7)
  Bottom Layer w3.5: M1.J1_8@182,681 199,681 216,664 387.1,664 466.1,585 886,585 1108.25,807.25 1108.25,869.8 1105.25,872.8 1105.25,953.05 v1(1096.6,961.7)
B35_L16_P: M1.J1_7 U1.G17 | length 1078.4
  Top Layer w3.5: U1.G17@1080.85,1008.95 v1(1096.6,993.2)
  Bottom Layer w3.5: M1.J1_7@369,680 381,680 469,592 883.1,592 1101.25,810.15 1101.25,866.9 1098.25,869.9 1098.25,928.75 1082,945 1082,974 1096.6,988.6 v1(1096.6,993.2)
B35_L17_N: M1.J1_14 U1.H20 | length 1132.2
  Top Layer w3.5: v1@1044,845 v1(1044,850) 1044,909.1 U1.H20@1049.35,914.45
  Bottom Layer w3.5: M1.J1_14@167,773 232,773 247,758 380.1,758 511.1,627 868.6,627 1049.6,807.99 1049.6,850.1 v1@1049.35,850.35
B35_L17_P: M1.J1_13 U1.J20 | length 935.2
  Top Layer w3.5: v1(1017.85,892.17) U1.J20@1017.85,914.45
  Bottom Layer w3.5: M1.J1_13@352,773 375,773 514,634 865.7,634 1042.6,810.89 1042.6,831.25 1038.1,835.75 1017.85,856 v1(1017.85,892.17)
B35_L18_N: M1.J1_9 U1.G20 | length 950.6
  Top Layer w3.5: v1(1080.85,892.17) U1.G20@1080.85,914.45
  Bottom Layer w3.5: M1.J1_9@363,711 378,711 483,606 877.3,606 1072.75,801.45 1072.75,871.75 1080.85,879.85 v1(1080.85,892.17)
B35_L18_P: M1.J1_10 U1.G19 | length 1199.4
  Top Layer w3.5: U1.G19@1080.85,945.95 1096,930.8 1096,877 1087,868 v1(1087,861)
  Bottom Layer w3.5: M1.J1_10@169,709 170,708 207,708 220,695 384.1,695 480.1,599 880.2,599 1087,805.8 v1(1087,861)
B35_L19_N: U1.G15
B35_L19_P: U1.H15
B35_L20_N: U1.J14
B35_L20_P: U1.K14
B35_L21_N: U1.N16
B35_L21_P: U1.N15 | length 22.3
  Top Layer w3.5: v1(876.2,1056.2) U1.N15@891.95,1071.95
B35_L22_N: U1.L15 | length 22.2
  Top Layer w3.5: v1(939.15,1056.25) U1.L15@954.85,1071.95
B35_L22_P: U1.L14 | length 22.2
  Top Layer w3.5: v1(939.15,1087.75) U1.L14@954.85,1103.45
B35_L23_N: U1.M15
B35_L23_P: U1.M14
B35_L24_N: M1.J1_21 U1.J16 | length 1097.7
  Top Layer w3.5: U1.J16@1017.55,1039.85 v1(1033.25,1055.55)
  Bottom Layer w3.5: M1.J1_21@340,900 375,900 585,690 842.51,690 941,788.49 941,867.25 954,880.25 954,931.9 971.25,949.15 971.25,966 946.25,991 946.25,1004 982.25,1040 1017.7,1040 v1(1033.25,1055.55)
B35_L24_P: M1.J1_22 U1.K16 | length 1209.2
  Top Layer w3.5: U1.K16@986.45,1040.45 v1(1002.15,1024.75)
  Bottom Layer w3.5: M1.J1_22@154.96,900 233,900 249,884 381.1,884 582.1,683 845.41,683 948.38,785.97 948.38,858.62 961,871.25 961,929 984.5,952.5 984.5,1007.1 v1(1002.15,1024.75)
DDR3_VREF: C6.2 C7.2 U1.H6 U1.P6 U6.H1 U6.M8 U14.6 | length 3162.6
  Top Layer w10: v1(845.8,1370) U1.P6@860.45,1355.35 ; v1(870.25,1874) U6.M8@885.76,1889.51 ; U6.H1@1011.75,2109.98 1011.75,2127.75 v1(1019,2135) ; U1.H6@1049.35,1355.35 1064,1370 v1(1065.1,1370)
  Top Layer w20: 89,2012 89,1969 96,1962 C7.2@96,1943 96.14,1942.86 C6.2@96.14,1902 96.14,1869.14 v1(96,1869)
  VCC w4: v1(845.8,1370) 861.3,1354.5 1026.5,1354.5 1034.8,1362.8 1057.9,1362.8 v1(1065.1,1370)
  VCC w10: v1@314,2150 355.5,2191.5 971.5,2191.5 1019,2144 v1(1019,2135)
  Bottom Layer w3.5: 792,1422 795.1,1418.9 819.1,1418.9 830,1408 830,1395.58
  Bottom Layer w5: 400,1871 400,1639 454,1585 569,1585 601,1553 720,1553 766,1507 766,1448 792,1422 ; 830,1395.58 832.8,1392.78 832.8,1383 v1(845.8,1370)
  Bottom Layer w10: 397,1874 400,1871 409,1862 736,1862 748,1874 v1(870.25,1874)
  Bottom Layer w20: v1(96,1869) 124,1841 185,1841 218,1874 267,1874 ; v1(315,2149) 312,2146 312,1919 267,1874 ; 397,1874 267,1874
DDR3_VTT: C1.2 C2.2 C24.2 C25.2 C26.2 C27.2 RR1.1 RR1.2 RR1.3 RR1.4 RR2.1 RR2.2 RR2.3 RR2.4 RR3.1 RR3.2 RR3.3 RR3.4 RR4.1 RR4.2 RR4.3 RR4.4 RR5.1 RR5.2 RR5.3 RR5.4 RR6.1 RR6.2 RR6.3 RR6.4 U14.3 U14.5 | length 1210.1
  Top Layer w10: C27.2@65,2292.72 C24.2@106.09,2292.72 ; U14.3@134,2118.7 134,2098 126,2090 104,2090 94.6,2099.4 U14.5@94.6,2118.7 94.6,2142.4 85,2152 85,2176.72 C2.2@88.28,2180 88.28,2219.86 C1.2@88.14,2220 88.14,2274.77 C24.2@106.09,2292.72 ; v1(234,2289) 191.72,2289 C26.2@188,2292.72 C25.2@148,2292.72 C24.2@106.09,2292.72
  Bottom Layer w10: v1(234,2289) 272,2289 313.37,2330.37 RR1.1@413.37,2330.37 RR1.2@433.84,2330.37 RR1.3@453.53,2330.37 RR1.4@474,2330.37 RR2.1@515.17,2330.37 RR2.2@535.64,2330.37 RR2.3@555.33,2330.37 RR2.4@575.8,2330.37 RR3.1@616.97,2330.37 RR3.2@637.44,2330.37 RR3.3@657.13,2330.37 RR3.4@677.6,2330.37 RR4.1@718.77,2330.37 RR4.2@739.24,2330.37 RR4.3@758.93,2330.37 RR4.4@779.4,2330.37 RR5.1@820.57,2330.37 RR5.2@841.04,2330.37 RR5.3@860.73,2330.37 RR5.4@881.2,2330.37 RR6.1@922.37,2330.37 RR6.2@942.84,2330.37 RR6.3@962.53,2330.37 RR6.4@983,2330.37

## Text inside footprints (layer, text, board x,y; h text height)
C127: Mechanical 10 "2" at 1571,74 h24; Mechanical 10 "1" at 1505,74 h24
C128: Mechanical 10 "1" at 1440,341 h24 r90; Mechanical 10 "2" at 1440,407 h24 r90
C130: Mechanical 10 "2" at 1256,71 h24; Mechanical 10 "1" at 1190,71 h24
C131: Mechanical 10 "1" at 1111,343 h24 r90; Mechanical 10 "2" at 1111,409 h24 r90
C133: Mechanical 10 "2" at 583,73 h24; Mechanical 10 "1" at 517,73 h24
C135: Mechanical 10 "1" at 447,348 h24 r90; Mechanical 10 "2" at 447,414 h24 r90
C136: Mechanical 10 "2" at 910,72 h24; Mechanical 10 "1" at 844,72 h24
C138: Mechanical 10 "2" at 786,409 h24 r90; Mechanical 10 "1" at 786,343 h24 r90
DONE: Top Overlay "+" at 541,1415.17 h24 r270
S0: Top Overlay "+" at 543,1303.17 h24 r270